# Altium PCB armBoardProto.PcbDoc
Units mil, origin at the board's own origin, x right, y up, seen from the top; angles counter-clockwise.
Board outline 1491.6 x 3133.88 mil, 2 copper layers (Top Layer, Bottom Layer); 31 components, 35 nets, 141 pads, 51 vias.
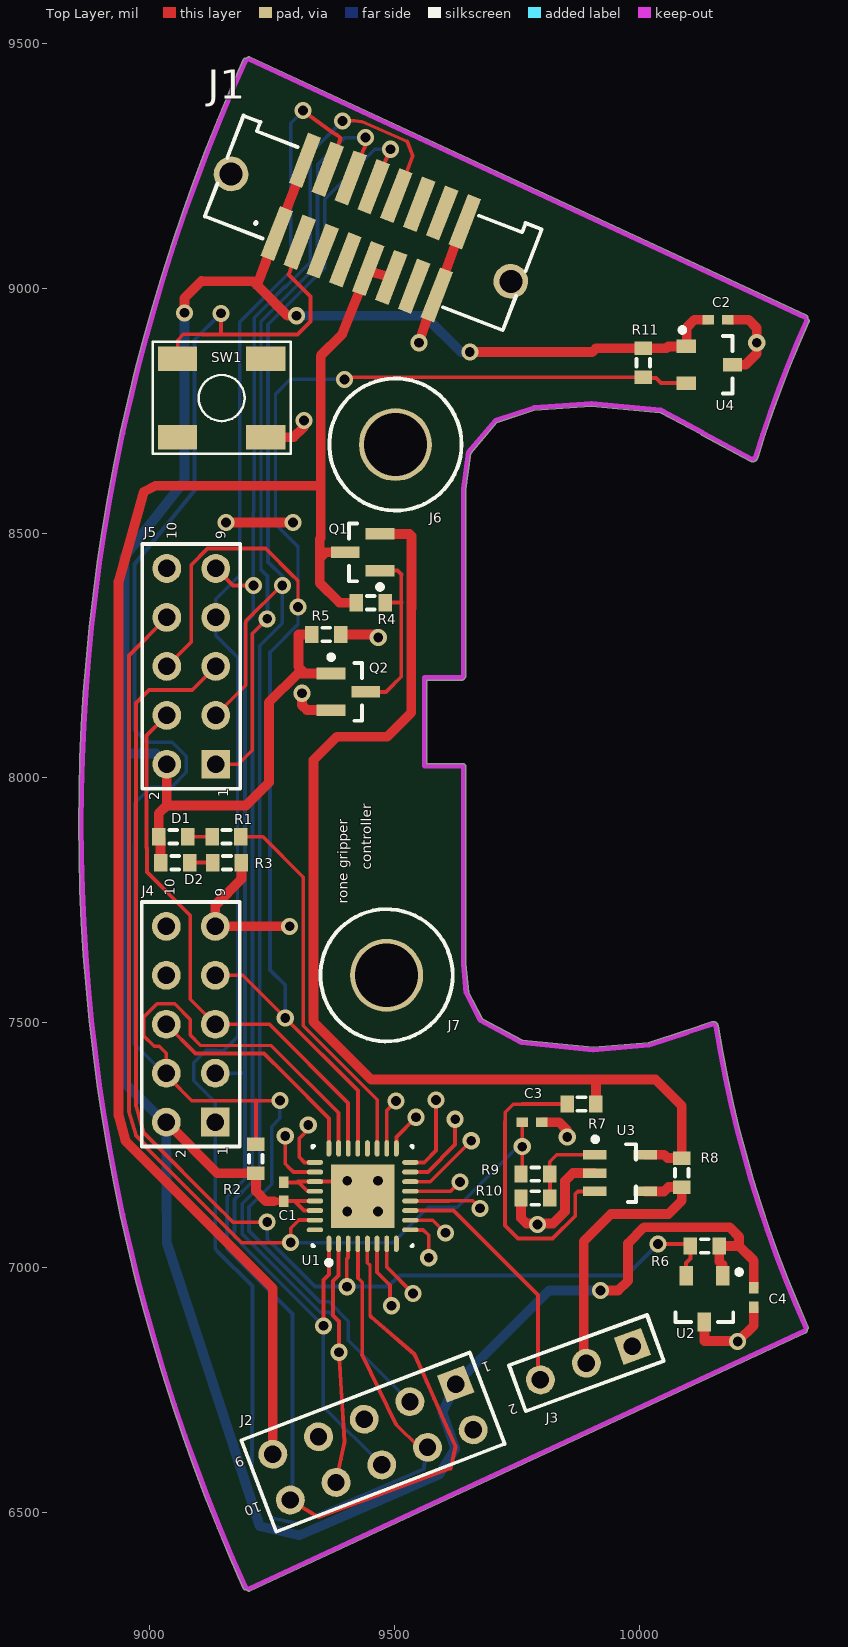
[diagram p0: Top Layer view]
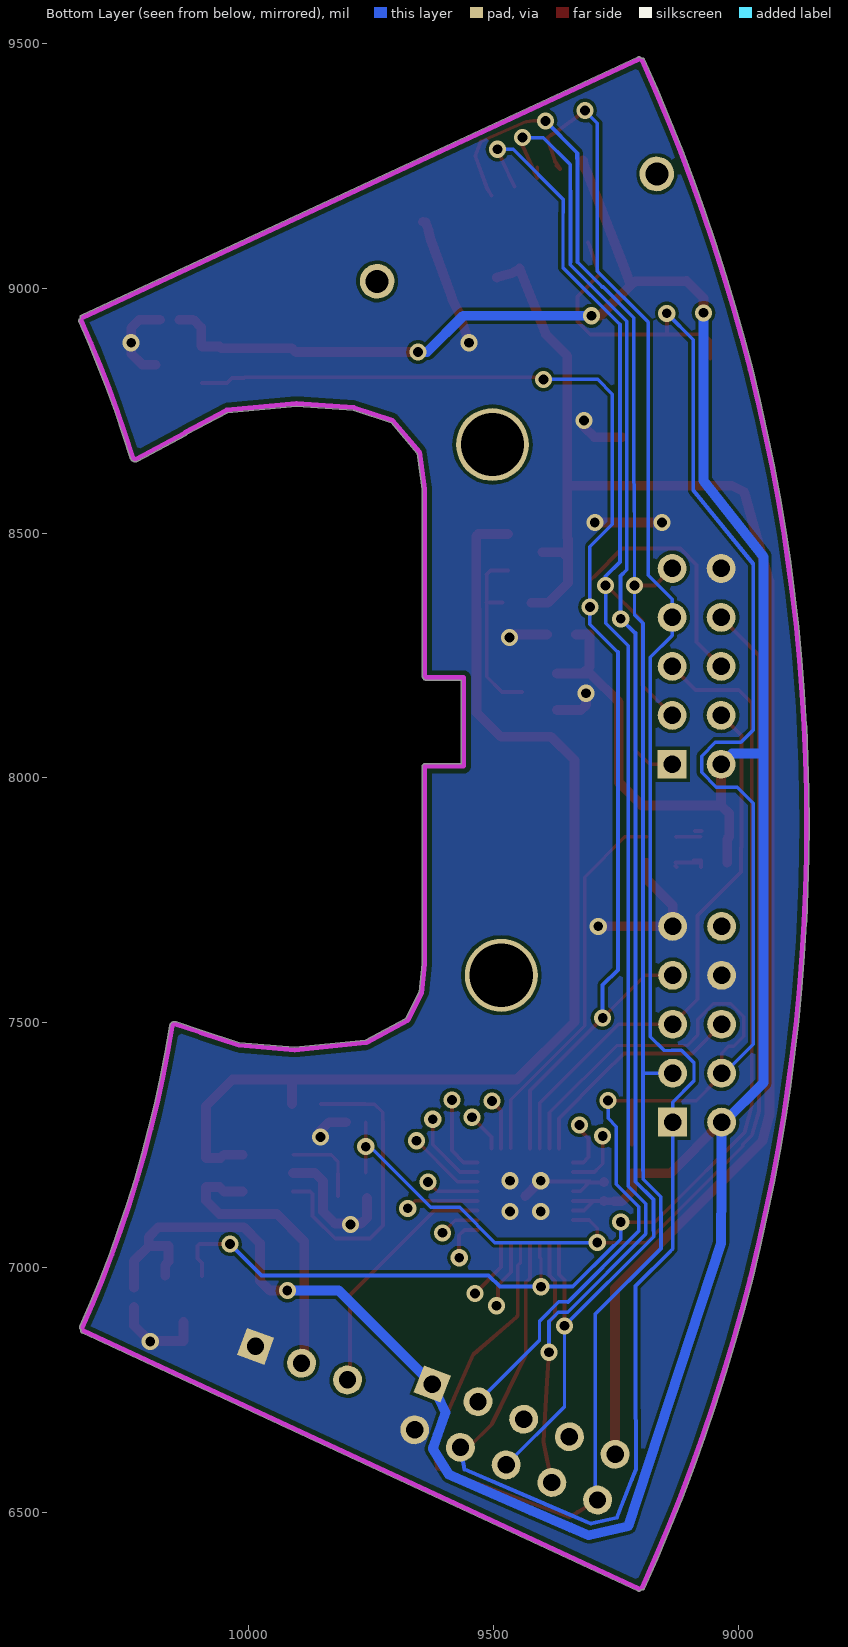
[diagram p1: Bottom Layer view, seen from below]

## Layer stack, top to bottom
Top Layer: signal copper 1.4
Dielectric: dielectric 12.6, FR-4, Dk 4.8
Bottom Layer: signal copper 1.4

## Board outline
9191.6,6344.49 ccw(c9196.17,6346.55) 9198.28,6342 ccw(c9202.85,6344.07) 9204.97,6339.52 10339.81,6866.36 ccw(c10337.7,6870.91) 10342.71,6870.91 ccw(c10337.7,6870.91) 10342.23,6873.06 ccw(c10340.12,6877.61) 10345.14,6877.61 ccw(c10340.12,6877.61) 10344.7,6879.65 cw(c12610.49,7891.01) 10161.31,7493.32 ccw(c10156.36,7492.51) 10160.87,7494.7 ccw(c10155.89,7494.15) 10160.64,7495.75 ccw(c10151.15,7492.56) 10147.98,7502.06 10147.96,7502.05 cw(c10149.56,7497.3) 10147.98,7502.06 10147.96,7502.05 10097.3,7485.14 ccw(c10098.88,7480.39) 10097.28,7485.14 ccw(c10098.31,7480.23) 10096.72,7484.99 10019.15,7459.09 9906,7449.69 9761.43,7464.25 9679.2,7508.47 9651.31,7562.7 9645.59,7620.44 9645.59,8023.43 ccw(c9640.57,8023.43) 9643.82,8027.25 ccw(c9640,8024) 9640,8029.01 9566.01,8029.01 9566.01,8199.99 9638.5,8199.99 ccw(c9638.5,8205) 9643.4,8203.93 ccw(c9640.57,8208.07) 9645.59,8208.07 9645.59,8589.89 9656.01,8663.06 9708.73,8725.75 9785.67,8751.43 9902.32,8759.59 10043.48,8746.28 10126.64,8701.57 ccw(c10129.01,8705.98) 10126.66,8701.56 ccw(c10130.65,8704.58) 10128.28,8700.17 10227.13,8647.01 ccw(c10229.53,8651.41) 10227.15,8647 cw(c10231.9,8655.82) 10227.14,8647.01 cw(c10231.9,8655.82) 10227.11,8647.02 10227.15,8647 ccw(c10231.9,8655.82) 10240.68,8651.01 ccw(c10236.28,8653.42) 10241.11,8652.04 ccw(c10236.91,8654.79) 10241.7,8653.3 cw(c12649,7906) 10346.49,8931.67 ccw(c10341.91,8933.71) 10346.92,8933.71 ccw(c10341.91,8933.71) 10344.03,8938.26 ccw(c10339.45,8940.28) 10344.46,8940.28 ccw(c10339.45,8940.28) 10341.56,8944.83 9204.94,9472.47 ccw(c9202.83,9467.93) 9198.27,9470 ccw(c9196.17,9465.45) 9191.6,9467.51 ccw(c12649,7906)

## Design rules (kind name [scope] priority, off if disabled: settings)
Clearance Clearance_1 [All vs OnLayer('Keep-Out Layer')] p1: gap=10
Clearance "Via to Pad Clearance" [(InPadClass('All Pads')) vs IsVia] p2: gap=20
Clearance [All] p3: gap=7
ComponentClearance [All] p1: gap=10 collisioncheckmode=3 verticalgap=10 showdistances=TRUE
HoleSize [All] p1: absolutevalues=TRUE maxlimit=250 minlimit=20 maxpercent=80.000 minpercent=20.000
MinimumAnnularRing [All] p1: minimumring=7
MinimumSolderMaskSliver [All] p1: minsoldermaskwidth=0
PolygonConnect PolygonConnect_2 [All] p1: connectstyle=Direct reliefconductorwidth=10 reliefentries=4 polygonreliefangle="90 Angle"
PolygonConnect PolygonConnect_1 [InNet('5V')] p2 off: connectstyle=Direct reliefconductorwidth=10 reliefentries=4 polygonreliefangle="90 Angle"
PolygonConnect [All] p3 off: connectstyle=Relief reliefconductorwidth=10 reliefentries=4 polygonreliefangle="90 Angle"
RoutingVias [All] p1: holewidth=20 width=35 viastyle="Through Hole" minholewidth=20 minwidth=35 maxholewidth=20 maxwidth=35
SMDNeckDown [All] p1: percent=120.000
ShortCircuit [All] p1: allowed=TRUE
SilkToSilkClearance [All] p1: silktosilkclearance=0.5
SilkscreenOverComponentPads [All] p1: minsilkscreentomaskgap=1
SolderMaskExpansion [All] p1: expansion=4
Width "Schematic Width Constraint_7" [InNet('GND')] p1: maxlimit=185 minlimit=8 preferedwidth=20 minimp=50.000000 maximp=50.000000 favimp=50.000000
Width "Schematic Width Constraint_6" [InNet('3.3V') or InNet('VBAT') or InNet('VBAT_SWITCHED')] p2: maxlimit=50 minlimit=8 preferedwidth=20 minimp=50.000000 maximp=50.000000 favimp=50.000000
Width [All] p3: maxlimit=30 minlimit=7 preferedwidth=7 minimp=50.000000 maximp=50.000000 favimp=50.000000
22 further rules are at their usual default settings.

## Components (designator, comment, footprint, x,y, rotation, side; value= is the part's Value field where it differs from the comment)
C1 "Cap Semi" CAPC1005L 9274,7155 r270 top
C2 "Cap Semi" CAPC1005L 10161,8936 r180 top
C3 "Cap Semi" CAPC1005L 9781,7297 r180 top
C4 "Cap Semi" CAPC1005L 10234,6939 r90 top
D1 "Heartbeat (White)" SurfaceMount(603) 9048,7880 r0 top
D2 "Power LED (RED)" SurfaceMount(603) 9052,7827 r0 top
J1 "header" "HEADERSM 8X2" 9452,9124 r69 top
J2 "Header 5X2" HDR2X5 9625,6762 r201 top
J3 "Header 3" HDR1X3 9986,6839 r200 top
J4 "JTAG" HDR2X5 9134,7297 r90 top
J5 "Header 5X2" HDR2X5 9135,8028 r90 top
J6 "Mechanical_Hole" #4_Screw_Hole 9502,8681 r0 top
J7 "Mechanical_Hole" #4_Screw_Hole 9484,7597 r0 top
Q1 "DMG2301U-7" SOT-23 9435,8461 r180 top
Q2 "IRF540PBF" SOT-23 9406,8176 r0 top
R1 "DiodeRes" J1-0603 9157,7880 r0 top
R2 "ResetRes" J1-0603 9217,7222 r90 top
R3 "DiodeRes" J1-0603 9158,7827 r0 top
R4 "" J1-0603 9452,8358 r0 top
R5 "" J1-0603 9361,8293 r0 top
R6 "" J1-0603 10134,7044 r180 top
R7 "R_IN" J1-0603 9882,7334 r180 top
R8 "RLOAD" J1-0603 10087,7194 r270 top
R9 "LPF" J1-0603 9788,7191 r180 top
R10 "R_OUT" J1-0603 9788,7142 r0 top
R11 "" J1-0603 10008,8848 r270 top
SW1 "Switch-TL330" SwitchTall-TL330 9147,8776 r0 top
U1 "MSP430G2553" QFN-32 9435,7146 r90 top
U2 "A3211-12" "SOT-23 W" 10133,6936 r270 top
U3 "LT6106" TSOT-23-5_LT6106 9961,7193 r0 top
U4 "A3211-12" "SOT-23 W" 10143,8844 r0 top

## Footprints (in the part's own frame and the unit in brackets; to place one, negate y for a bottom-side part, rotate by r counter-clockwise, add the part's x,y. Pads: shape width x height; smd on the part's side, far side on the other; paste and mask are expansions set on the pad)
#4_Screw_Hole [mil] "#4 Screw Hole, 3.2766mm Hole Dia., Plated"
  round 149 hole 129: 1(0,0)
  silkscreen extent -135,-135 135,135
CAPC1005L [mm] "Chip Capacitor, Body 1.0x0.5mm, IPC High Density"
  rect 0.6x0.5 smd: 1(-0.5,0) 2(0.5,0)
  body extent -0.55,-0.3 0.55,0.3, height 1.3
HDR1X3 [mm] "Connector; Header; 3 Position"
  rect 1.5x1.5 hole 0.9: 1(0,0)
  round 1.5 hole 0.9: 2(2.54,0) 3(5.08,0)
  silkscreen extent -1.27,-1.27 6.35,1.27
HDR2X5 [mm] "Connector; Header; 5x2 Position"
  rect 1.5x1.5 hole 0.9: 1(0,0)
  round 1.5 hole 0.9: 2(0,2.54) 3(2.54,0) 4(2.54,2.54) 5(5.08,0) 6(5.08,2.54) 7(7.62,0) 8(7.62,2.54) 9(10.16,0) 10(10.16,2.54)
  silkscreen extent -1.27,-1.27 11.43,3.81
"HEADERSM 8X2" [mm]
  rect 2.795x0.74 smd: 1(-2.032,4.445) 2(2.033,4.445) 3(-2.032,3.175) 4(2.033,3.175) 5(-2.032,1.905) 6(2.033,1.905) 7(-2.032,0.635) 8(2.033,0.635) 9(-2.032,-0.635) 10(2.033,-0.635) 11(-2.032,-1.905) 12(2.033,-1.905) 13(-2.032,-3.175) 14(2.033,-3.175) 15(-2.032,-4.445) 16(2.033,-4.445)
  round 1.8 hole 1.19: c1(0,7.773) c2(0,-7.773)
  silkscreen extent -2.54,-8.29 3.1,8.26
J1-0603 [mm] "Chip Resistor, Body 1.6x0.8mm, IPC High Density"
  rect 0.7x0.9 smd: 1(-0.75,0) 2(0.75,0)
  silkscreen extent -0.2,-0.35 0.2,0.35, body extent -0.85,-0.48 0.85,0.48, height 0.9
QFN-32 [mm] "QFN, 32-Leads, Body 5.2x5.2mm (max), Pitch 0.50mm, IPC Medium Density"
  oval 0.85x0.25 smd: 1(-2.475,1.75) 2(-2.475,1.25) 3(-2.475,0.75) 4(-2.475,0.25) 5(-2.475,-0.25) 6(-2.475,-0.75) 7(-2.475,-1.25) 8(-2.475,-1.75) 17(2.475,-1.75) 18(2.475,-1.25) 19(2.475,-0.75) 20(2.475,-0.25) 21(2.475,0.25) 22(2.475,0.75) 23(2.475,1.25) 24(2.475,1.75)
  oval 0.25x0.85 smd: 9(-1.75,-2.475) 10(-1.25,-2.475) 11(-0.75,-2.475) 12(-0.25,-2.475) 13(0.25,-2.475) 14(0.75,-2.475) 15(1.25,-2.475) 16(1.75,-2.475) 25(1.75,2.475) 26(1.25,2.475) 27(0.75,2.475) 28(0.25,2.475) 29(-0.25,2.475) 30(-0.75,2.475) 31(-1.25,2.475) 32(-1.75,2.475)
  rect 3.3x3.3 smd: 33(0,0)
  silkscreen extent -3.57,-2.6 2.6,2.6, body extent -2.57,-2.58 2.58,2.57, height 1
SOT-23 [mm] "SOT23, 3-Leads, Body 3.0x2.5mm (max), Pitch 0.95mm, IPC Medium Density"
  rect 1.5x0.6 smd: 1(-0.9,0.95) 2(-0.9,-0.95) 3(0.9,0)
  silkscreen extent -1.03,-1.5 0.7,1.92, body extent -0.7,-1.5 0.7,1.5, height 1.2
"SOT-23 W" [mm] "SOT23, 3-Leads, Body 3.0x2.5mm (max), Pitch 0.95mm, IPC Medium Density"
  rect 1x0.7 smd: 1(-1.2,0.95) 2(-1.2,-0.95) 3(1.2,0)
  silkscreen extent -1.52,-1.5 1.2,1.93, body extent -1.19,-1.5 1.22,1.5, height 1.2
SurfaceMount(603) [mm]
  rect 0.7x0.9 smd: 1(-0.75,0) 2(0.75,0)
  silkscreen extent -0.2,-0.35 0.2,0.35, body extent -0.85,-0.48 0.85,0.48, height 0.9
SwitchTall-TL330 [mil] "Small SMDTall Tact Switch E-Switch TL330"
  rect 80x50 smd: 1(-90,80) 2(90,80) 3(-90,-80) 4(90,-80)
  silkscreen extent -141,-114 141,115
TSOT-23-5_LT6106 [mm] "A SOT-23 package with 5 pins for LT6106"
  rect 1.22x0.5 smd: 1(-1.31,0.95) 2(-1.31,0) 3(-1.31,-0.95) 4(1.31,-0.95) 5(1.31,0.95)
  silkscreen extent -1.42,-1.5 0.81,1.88, body extent -0.81,-1.5 0.84,1.5, height 1.2

## Part data
C1 C2 C3 C4: "Capacitor (Semiconductor SIM Model)"
D1 D2: library part LED
J1: library part "HEADER 8X2"
J2 J5: "Header, 5-Pin, Dual row"
J3: "Header, 3-Pin"
J4: library part "Header 5X2", "Header, 5-Pin, Dual row"
J6 J7: "A mechanical hole for mounting the board"
Q1: library part P-Mosfet
Q2: library part N-Mosfet
R1 R2 R3 R4 R5 R6 R7 R8 R9 R10 R11: library part Res3, "Resistor"
U2 U4: library part A311-12, "Hall Effect Sensor"
U3: "Current Sense Amplifier"

## Via types
v1: diameter 35, hole 20, Top Layer to Bottom Layer, 51 vias

## Nets (pads, with @x,y where several pads share a name; then routed paths per layer and width w, separated by ;. In a path a pad name is that pad's centre, name@x,y a point inside that pad or via, vN(x,y) a via of type N, cw(c..) or ccw(c..) an arc to the next point about the centre after c; other vN are vias at no path point)
3.3V: C1.2 C2.2 C4.2 D1.1 D2.1 J1.1 J1.2 J2.1 J4.2 J5.2 Q2.1 R2.1 R5.1 R6.1 R11.1 U1.29 U1.30 U2.1 U4.1 | length 7067.7
  Top Layer w8: C1.2@9274.84,7136.16 9295.84,7136.16 ; U1.30 9315.53,7116.47 9295.84,7136.16 ; U1.29 9295.84,7136.16
  Top Layer w15: 9254,7135.31 C1.2
  Top Layer w20: D2.1 9022.47,7876 D1.1 9018.47,7927.47 9035,7944 ; J4.2 9138.53,7192.47 R2.1 9217,7156 9237.69,7135.31 9254,7135.31 ; J5.2 9035,7944 ; v1(9071,8950) 9071,8980 9106,9015 9106.5,9014.5 9211.5,9014.5 9219.5,9006.5 ; C1.2 C1.2@9274.84,7136.16 ; v1(9300,8944) 9282,8944 9219.5,9006.5 ; J1.2 9313,9245 9312,9243 9310,9240 J1.1 9238,9056 9219.5,9006.5 ; R5.1 9304,8293 9304,8227 9317.6,8213.4 ; Q2.1 9317.6,8213.4 ; v1(9654,8870) 9904,8870 9911.53,8877.53 R11.1 10055.53,8877.53 10059.4,8881.4 U4.1 10097,8882.65 10097,8920 10113,8936 C2.2 ; v1(9921,6953) 9957,6953 9977,6973 9977,7049.5 10010,7082.5 10184.5,7082.5 10204,7063 10204,7044 ; U2.1 10170.4,7005.6 10163.53,7012.47 R6.1 10204,7044 ; C4.2 10234,7014 10204,7044 ; 9035,7944 9197,7944 9244,7991 9244,8154.79 9302.61,8213.4 9317.6,8213.4
  Bottom Layer w20: J4.2@9028,7298 8948.5,7377.5 8948.5,8050 ; J4.2 9034.5,7173.5 9035,7051 9224.7,6472 9305.18,6453.12 9342.68,6469 9423.15,6504.15 9591.41,6577.65 9624.21,6629.72 9614.31,6657.78 9598,6704 J2.1 9816,6953 v1(9921,6953) ; J5.2 9013,8050 8948.5,8050 ; v1(9071,8950) 9071,8607 8948.5,8452 8948.5,8050 ; v1(9300,8944) 9561.67,8944 9635.67,8870 v1(9654,8870)
GND: C1.1 C2.1 C3.1 C4.1 J1.15 J1.16 J2.2 J3.1 J4.8 J4.9 J5.10 Q2.2 R3.2 R5.2 R10.1 SW1.4 U1.27 U1.28 U1.33 U2.3 U3.2 U4.3 | length 1912.9
  Top Layer w8: C1.1@9274.47,7174.21 9302.53,7174.21 ; U1.28 9322.21,7155.84 9302.53,7175.53 U1.27 U1.33@9405.47,7175.53
  Top Layer w20: v1(9156,8522) v1(9293,8522) ; R3.2 9187.53,7793.53 9134,7740 J4.9 v1(9286,7697) ; SW1.4 9294,8696 9314,8716 9314,8730 v1(9315,8730) ; C1.1 C1.1@9274.47,7174.21 ; v1(9311,8173) 9311,8148.6 9321,8138.6 Q2.2 ; R5.2 9467,8293 v1(9467,8287) ; U1.33@9405.47,7175.53 U1.33 ; v1(9550,8889) 9571,8952 9583,8975 J1.15 9628,9099 9633,9119 9639,9135 J1.16 ; R10.1 9758.47,7101.53 9770,7090 9824,7090 9848.31,7114.31 9848.31,7176.61 9864.7,7193 U3.2 ; C3.1 9836,7297 9853,7280 v1(9853,7267) ; U2.3 10133,6850 v1@10202,6850 ; C2.1 10223,8936 10240,8919 v1(10240,8889) 10240,8867 10217,8844 U4.3 ; v1(10201,6849) v1@10202,6850 ; C4.1 10234,6882 v1@10202,6850
  other v1: 9792,7088 9403.5,7114.5 9466.5,7114.5 9403.5,7177.5 9466.5,7177.5
GPIO_2.0: U1.9 | length 88.2
  Top Layer w8: U1.9 9558.9,7077.1 9570,7066 v1(9570,7020)
GPIO_2.1: U1.10 | length 82.2
  Top Layer w7: U1.10 9578.21,7096.79 v1(9604,7071)
GPIO_2.3: U1.15 | length 166.7
  Top Layer w8: U1.15 9568.21,7195.21 9624,7251 v1(9624,7303)
GPIO_2.4: U1.16 | length 165.5
  Top Layer w8: U1.16 9560.9,7214.9 9585,7239 v1(9585,7342)
GPIO_2.5: U1.17 | length 80.1
  Top Layer w8: U1.17 9503.9,7267 v1@9543.9,7307
  other v1: 9544,7307
GPIO_2.6: U1.26 | length 124.5
  Top Layer w7: v1(9277,7269) 9277,7212 9284,7205
  Top Layer w8: 9284,7205 9293.79,7195.21 U1.26
GPIO_2.7: U1.25 | length 109.6
  Top Layer w8: v1(9324,7291) 9324,7282 9305.5,7263.5 9305.5,7225.5 9316.1,7214.9 U1.25
GPIO_3.0: U1.7 | length 123.8
  Top Layer w8: U1.7 9484.21,7000.79 v1(9538,6947)
GPIO_3.1: U1.6 | length 138.8
  Top Layer w8: U1.6 9464.53,6990.47 9491,6964 9491,6925 v1(9494,6922)
GPIO_3.2: U1.12 | length 148.8
  Top Layer w7: 9612,7136.16 9659.84,7136.16 v1(9675,7121)
  Top Layer w8: U1.12 9612,7136.16
GPIO_3.3: U1.13 | length 109.5
  Top Layer w8: U1.13 9614.84,7155.84 v1(9634,7175)
GPIO_3.4: U1.14 | length 159.1
  Top Layer w7: U1.14 9573.53,7175.53 v1(9657,7259)
GPIO_3.5: U1.18 | length 104.3
  Top Layer w8: U1.18 9484.21,7321.21 v1(9503,7340)
HALL_SENSE0_ADC3: J5.5 R6.2 U1.3 U2.2 | length 2551.1
  Top Layer w7: 9147.15,7116.15 9170.3,7093 v1(9240,7093) ; v1(9403,6961) 9403,7018.53 9405.47,7021
  Top Layer w8: J5.5 9087,8180 8999,8180 8972.47,8153.47 8972.47,7329.79 8987.47,7275.83 9147.15,7116.15 ; 9405.47,7021 U1.3 ; v1(10038,7048) 10100.47,7048 R6.2 10104.47,7018.47 10095.6,7009.6 U2.2
  Bottom Layer w7: v1(9240,7093) 9240,7058.29 9268.65,7029.65
  Bottom Layer w8: 9255,7044 9338,6961 v1(9403,6961) 9487,6961 9510,6984 9974,6984 v1(10038,7048)
JTAG_BOTTOM_TCK_SPI_CLK_ADC4: J1.4 J2.4 J4.1 J5.7 U1.4 | length 4108.6
  Top Layer w7: 9425.16,6979.15 9434,6970.31 9434,6821.16 ; 9503,6680.19 9550.39,6632.81 J2.4
  Top Layer w8: v1(9313,9363) 9373,9319 9383,9313 9390,9307 9374,9259 J1.4 J1.4@9371,9250.52 ; 9425.16,6979.15 U1.4 ; 9434,6821.16 9503,6680.19
  Bottom Layer w7: 9139,7033 9134,7038 J4.1 9134,7338 9090.5,7381.5 9090.5,7418.5 9116,7444 9136,7444 9136.6,7443.4 9151,7443.4 9179.5,7471.9 9179.5,8246.5 9135,8291 J5.7 9135,8365 9184,8414 9184,8931.24 9288,9035.24 9288,9337 9313,9362 v1(9313,9363)
  Bottom Layer w8: 9139,7033 9210,6962 9210,6791 9209,6588 9217.29,6566.94 9248,6489 9300.86,6477 9344.47,6495.73 9446.54,6539.57 9559,6587.88 J2.4
JTAG_BOTTOM_TDI_HALL_SENSE1_I2C_CLK: J4.7 J5.6 R11.2 U1.21 U4.2 | length 3235.2
  Top Layer w7: J4.7 9190,7597 v1(9277,7510) ; 9294,8411.72 9303,8402.72 v1(9303,8349) ; v1(9398,8814) 9402.47,8818.47 R11.2 R11.2@10009.47,8817
  Top Layer w8: J5.6 9085,8278 9085,8435.31 9118.21,8468.53 9237.19,8468.53 9294,8411.72 ; v1(9277,7510) 9425.16,7361.84 U1.21 ; R11.2@10009.47,8817 10034,8817 10044.4,8806.6 U4.2
  Bottom Layer w7: 9246,8257 9303,8314 v1(9303,8349) 9303,8472.4 9257,8518.4 9257,8784 9287,8814 v1(9398,8814)
  Bottom Layer w8: 9246,8257 9246,7608 9277,7577 v1(9277,7510)
JTAG_BOTTOM_TDO_I2C_DATA: J4.5 J5.4 U1.22 | length 1137
  Top Layer w8: J5.4 8993.69,8086.69 8993.69,7857.73 8994.47,7856.95 8994.47,7807.95 9083,7719.42 9083,7548 J4.5 9244.52,7497 9405.47,7336.05 U1.22
JTAG_BOTTOM_TEST: J4.6 U1.24 | length 473.1
  Top Layer w8: J4.6 9093.47,7437.53 9233.47,7437.53 9277,7394 9366.1,7304.9 U1.24
JTAG_BOTTOM_TMS_SPI_SEL_EXPAND0_ADC5: J1.10 J2.10 J4.3 J5.9 U1.5 | length 4272.4
  Top Layer w7: v1(9394,9342) 9418.55,9342 cw(c9418.55,9263.59) 9433.08,9340.64 9525.88,9300 ; U1.5 9444.84,7010 9450.03,7004.81 9450.03,6901.86 9452.13,6899.76
  Top Layer w8: J5.9 9170,8393 v1(9212,8393) ; J2.10 9328.04,6500.39 9345,6490 9615,6590 9625,6634 9611,6665.5 9605,6679 9581,6733 9565.8,6767.2 9541,6823 9452.48,6899.4 9452.13,6899.76 ; J1.10 9512,9202 9537.09,9271 9525.88,9300
  Bottom Layer w7: J4.3 9194.5,7397 ; 9158,7113 9158.5,7113.5 9158.5,7144.79 9194.5,7180.79 9194.5,7198 ; 9211.5,8332.5 9212,8333 v1(9212,8393) 9212,8514 9212.71,8570.27 9213.5,8633 9213.5,8940.23 9246.13,8972.87 ; 9281.98,9007.4 9328,9053.42
  Bottom Layer w8: 9158,7113 9158,7039 9292.09,6904.91 9292.09,6529.99 J2.10 ; 9194.5,7198 9194.5,7397 9194.5,7451.79 9195,7452.29 9195,8316 9211.5,8332.5 ; 9246.13,8972.87 9275.77,9002.5 9277.08,9002.5 9281.98,9007.4 ; 9328,9053.42 9328,9276 9329,9277 ; 9329,9265 9329,9277 ; v1(9394,9342) 9329,9277
LED_HEARTBEAT: R1.2 U1.19 | length 778.1
  Top Layer w7: R1.2 9231.5,7880 9314,7797.5 9314,7493.51 9464.53,7342.98 U1.19
NetD1_2: D1.2 R1.1 | length 64.2
  Top Layer w8: D1.2@9074.53,7892 D1.2@9088,7892 ; D1.2 9125.47,7880 9126.47,7879 R1.1
NetD2_2: D2.2 R3.1 | length 78.8
  Top Layer w8: D2.2@9076.53,7818.5 9076.53,7832 D2.2@9092,7832 ; D2.2 R3.1 ; R3.1@9126.47,7818 R3.1@9128.47,7820
NetQ1_1: Q1.1 Q2.3 R4.2 | length 373.6
  Top Layer w7: 9498,8191 9514,8207 9514,8358 9514,8416
  Top Layer w8: Q2.3 9483,8176 9498,8191 ; Q1.1 9506.4,8423.6 9514,8416 ; R4.2 9514,8358
NetR7_2: R7.2 U3.3 | length 624.7
  Top Layer w7: 9726,7298.89 9726,7317 9743,7334 9761.11,7334
  Top Layer w8: 9726,7298.89 9726,7086 9752.5,7059.5 9823.2,7059.5 9869.31,7105.61 9869.31,7150 9874.91,7155.6 U3.3 ; 9761.11,7334 R7.2
NetR9_1: R9.1 R10.2 U3.1 | length 168.2
  Top Layer w7: R9.1 9817.53,7216.53 9831.4,7230.4 U3.1
  Top Layer w8: R10.2@9817.53,7146 R9.1
RESET_430: J1.3 J2.3 J4.4 R2.2 SW1.1 U1.23 | length 4212.9
  Top Layer w7: J4.4 9034,7438 9020,7452 9009,7452 8988.47,7472.53 8988.47,7512 9015,7538.53 9051.2,7538.53 9083,7506.73 9083,7475 9104.47,7453.53 9248.26,7453.53 9385.79,7316 ; SW1.1 9057,8894 9069,8906 9107,8906 ; 9062.5,7364.5 9086,7341 9217,7341 v1(9266,7341)
  Top Layer w8: J4.4@9029,7398 9062.5,7364.5 ; 9107,8906 9146,8906 ; v1(9146,8949) 9146,8906 ; R2.2 9217,7341 ; J1.3 9303.14,9085.54 9284,9028 9328.5,8983.5 9328.5,8932.19 9302.31,8906 9146,8906 ; U1.23 9385.79,7316
  Bottom Layer w7: 8969.5,7456.5 9029,7397 J4.4 ; 8969.5,7865 8969.5,7948.5 9002,7981 9044.61,7981 9075.03,8011.42 9075.03,8044.58 9046.61,8073 8994.5,8073 8969.5,8098 ; 9203.21,7124 9249,7169.79 9249,7288 9266,7305 v1(9266,7341) ; 9347.79,6930 9366.81,6930 9406,6890.81 9406,6851.81 J2.3
  Bottom Layer w8: 8969.5,7456.5 8969.5,7865 ; 8969.5,8098 8969.5,8437 9092,8587.5 9092,8895 v1(9146,8949) ; 9203.21,7124 9203.21,7074.57 9347.79,6930
SERVO0: J3.3 U1.11 | length 507.5
  Top Layer w8: U1.11 9620.53,7116.47 9793,6944 9793,6775.66 J3.3
SERVO0_POWER: J3.2 R8.2 U3.4 | length 594.4
  Top Layer w8: J3.2 J3.2@9894,6806.77
  Top Layer w20: J3.2 9886.5,6810.33 9886.5,7053.5 9942.5,7109.5 10059.5,7109.5 10087,7137 R8.2 10059.47,7164.47 10050.6,7155.6 U3.4
SERVO0_SENSE_ADC0: C3.2 J5.8 R9.2 U1.31 | length 2243.6
  Top Layer w7: 9177.79,7061 9187.79,7051 v1(9288,7051) 9288,7080 9304.79,7096.79 ; R9.2@9761,7193.53 v1(9761,7247) C3.2@9761,7296.68
  Top Layer w8: J5.8 8957.47,8250.47 8957.47,7319 8972.47,7269.62 8990.89,7251.19 8990.89,7247.89 9177.79,7061 ; 9304.79,7096.79 U1.31
  Bottom Layer w7: v1(9288,7051) 9497,7051 9569,7123 9628,7123 9752,7247 v1(9761,7247)
SPI_MISO_ADC1: J1.6 J2.6 J5.1 U1.1 | length 3632.8
  Top Layer w7: J5.1 9181,8028 9210,8057 9210,8295 v1(9240,8325) ; v1@9440.42,9290.9 9441,9291.48 v1(9441,9308)
  Top Layer w8: v1(9355,6881) 9355,6974.52 9366.1,6985.62 U1.1 ; J1.6@9410.66,9247 J1.6 9416,9237 v1@9440.42,9290.9
  Bottom Layer w7: 9173,7076 9173,7063 v1(9355,6881) 9355,6716.09 J2.6 ; 9240.5,8412.5 9227.5,8425.5 9227.5,8933.02 9228.11,8933.02 9343,9047.91 9343,9054 ; 9343,9199 9343,9253 9398,9308 v1(9441,9308)
  Bottom Layer w8: 9173,7076 9173,7138.79 9209.5,7175.29 9209.5,7237.23 9210,7237.73 9210,8296 ; 9211,8296 v1(9240,8325) 9240.5,8325.5 9240.5,8412.5 ; 9343,9054 9343,9199
SPI_MOSI_ADC2: J1.8 J2.8 J5.3 U1.2 | length 3688.5
  Top Layer w7: J5.3 9196,8189 9196,8320.6 9268.4,8393 v1(9271,8393)
  Top Layer w8: J2.8 9390.47,6608.47 9397.76,6644 9390.41,6766.59 v1(9386.79,6827) 9386.79,6889.52 9374.5,6901.81 9374.5,6972.81 9385.79,6984.09 U1.2 ; J1.8 9468,9230 v1(9492,9284)
  Bottom Layer w7: 9242,8926.31 9358,9042.31 9358,9154 9357.5,9154.5 9357.5,9182 9358,9182 9460,9284 v1(9492,9284) ; v1(9271,8393) 9271,8316.4 9225,8270.4 9225,7166.29 9188.71,7130.01 9188.71,7068.57 9348.28,6909 9367.31,6909 9386,6890.31 v1@9386,6827
  Bottom Layer w8: 9242,8926.31 9242,8441.09 9271,8412.09 v1(9271,8393) ; 9386,6890.31 9386.79,6889.52 v1(9386.79,6827)
VBAT: J1.9 J1.11 J2.9 Q1.3 R4.1 | length 3334.4
  Top Layer w20: J2.9 9251.57,6957.52 8951.47,7257.62 8936.47,7310.3 8936.47,8401.47 8987.84,8584.38 9012.21,8597 9348.5,8597 9349.5,8598 ; Q1.3 9359,8461 9347.5,8449.5 ; R4.1 9388,8358 9347.5,8398.5 9347.5,8449.5 ; J1.11 9462,9031 J1.9 9393,8906 9349.5,8862.5 9349.5,8598 ; 9347.5,8449.5 9347.5,8488 9349.5,8490 9349.5,8598
VBAT_SWITCHED: Q1.2 R7.1 R8.1 U3.5 | length 2258
  Top Layer w20: Q1.2 9531,8498.4 9535,8494.4 9535,8346 9534.5,8345.5 9534.5,8133.5 9485,8084 9382,8084 9334.5,8036.5 9334.5,7502 9452.5,7384 9910,7384 10033,7384 10087,7330 R8.1 10057.47,7223.53 10050.6,7230.4 U3.5 ; R7.1 9911.53,7382.47
pads on no net: J1.5 J1.7 J1.12 J1.13 J1.14 J1.c1 J1.c2 J2.5 J2.7 J4.10 J6.1 J7.1 SW1.2 SW1.3 U1.8 U1.20 U1.32

## Polygon pours and split planes (outlines as drawn)
no net on Mechanical 1 "GND" (none, shelved): 9191.6,6344.49 ccw(c9196.17,6346.55) 9198.28,6342 ccw(c9202.85,6344.07) 9204.97,6339.52 10339.81,6866.36 ccw(c10337.7,6870.91) 10342.71,6870.91 ccw(c10337.7,6870.91) 10342.23,6873.06 ccw(c10340.12,6877.61) 10345.14,6877.61 ccw(c10340.12,6877.61) 10344.7,6879.65 cw(c12610.49,7891.01) 10161.31,7493.32 ccw(c10156.36,7492.51) 10160.87,7494.7 ccw(c10155.89,7494.15) 10160.64,7495.75 ccw(c10151.15,7492.56) 10147.98,7502.06 10147.96,7502.05 cw(c10149.56,7497.3) 10147.98,7502.06 10147.96,7502.05 10097.3,7485.14 ccw(c10098.88,7480.39) 10097.28,7485.14 ccw(c10098.31,7480.23) 10096.72,7484.99 10019.15,7459.09 9906,7449.69 9761.43,7464.25 9679.2,7508.47 9651.31,7562.7 9645.59,7620.44 9645.59,8023.43 ccw(c9640.57,8023.43) 9643.82,8027.25 ccw(c9640,8024) 9640,8029.01 9566.01,8029.01 9566.01,8199.99 9638.5,8199.99 ccw(c9638.5,8205) 9643.4,8203.93 ccw(c9640.57,8208.07) 9645.59,8208.07 9645.59,8589.89 9656.01,8663.06 9708.73,8725.75 9785.67,8751.43 9902.32,8759.59 10043.48,8746.28 10126.64,8701.57 ccw(c10129.01,8705.98) 10126.66,8701.56 ccw(c10130.65,8704.58) 10128.28,8700.17 10227.13,8647.01 ccw(c10229.53,8651.41) 10227.15,8647 cw(c10231.9,8655.82) 10227.14,8647.01 cw(c10231.9,8655.82) 10227.11,8647.02 10227.15,8647 ccw(c10231.9,8655.82) 10240.68,8651.01 ccw(c10236.28,8653.42) 10241.11,8652.04 ccw(c10236.91,8654.79) 10241.7,8653.3 cw(c12649,7906) 10346.49,8931.67 ccw(c10341.91,8933.71) 10346.92,8933.71 ccw(c10341.91,8933.71) 10344.03,8938.26 ccw(c10339.45,8940.28) 10344.46,8940.28 ccw(c10339.45,8940.28) 10341.56,8944.83 9204.94,9472.47 ccw(c9202.83,9467.93) 9198.27,9470 ccw(c9196.17,9465.45) 9191.6,9467.51 ccw(c12649,7906)
GND on Bottom Layer "GND" (solid, remove dead copper, pour order 4): 9191.6,6344.49 ccw(c9196.17,6346.55) 9198.28,6342 ccw(c9202.85,6344.07) 9204.97,6339.52 10339.81,6866.36 ccw(c10337.7,6870.91) 10342.71,6870.91 ccw(c10337.7,6870.91) 10342.23,6873.06 ccw(c10340.12,6877.61) 10345.14,6877.61 ccw(c10340.12,6877.61) 10344.7,6879.65 cw(c12610.49,7891.01) 10161.31,7493.32 ccw(c10156.36,7492.51) 10160.87,7494.7 ccw(c10155.89,7494.15) 10160.64,7495.75 ccw(c10151.15,7492.56) 10147.98,7502.06 10147.96,7502.05 cw(c10149.56,7497.3) 10147.98,7502.06 10147.96,7502.05 10097.3,7485.14 ccw(c10098.88,7480.39) 10097.28,7485.14 ccw(c10098.31,7480.23) 10096.72,7484.99 10019.15,7459.09 9906,7449.69 9761.43,7464.25 9679.2,7508.47 9651.31,7562.7 9645.59,7620.44 9645.59,8023.43 ccw(c9640.57,8023.43) 9643.82,8027.25 ccw(c9640,8024) 9640,8029.01 9566.01,8029.01 9566.01,8199.99 9638.5,8199.99 ccw(c9638.5,8205) 9643.4,8203.93 ccw(c9640.57,8208.07) 9645.59,8208.07 9645.59,8589.89 9656.01,8663.06 9708.73,8725.75 9785.67,8751.43 9902.32,8759.59 10043.48,8746.28 10126.64,8701.57 ccw(c10129.01,8705.98) 10126.66,8701.56 ccw(c10130.65,8704.58) 10128.28,8700.17 10227.13,8647.01 ccw(c10229.53,8651.41) 10227.15,8647 cw(c10231.9,8655.82) 10227.14,8647.01 cw(c10231.9,8655.82) 10227.11,8647.02 10227.15,8647 ccw(c10231.9,8655.82) 10240.68,8651.01 ccw(c10236.28,8653.42) 10241.11,8652.04 ccw(c10236.91,8654.79) 10241.7,8653.3 cw(c12649,7906) 10346.49,8931.67 ccw(c10341.91,8933.71) 10346.92,8933.71 ccw(c10341.91,8933.71) 10344.03,8938.26 ccw(c10339.45,8940.28) 10344.46,8940.28 ccw(c10339.45,8940.28) 10341.56,8944.83 9204.94,9472.47 ccw(c9202.83,9467.93) 9198.27,9470 ccw(c9196.17,9465.45) 9191.6,9467.51 ccw(c12649,7906)

## Keep-outs
Keep-Out Layer:
  lines w10: 9196.17,6346.55 cw(c12649,7906) 9196.17,9465.45 ; 9202.85,6344.07 10337.7,6870.91 ; 9202.83,9467.93 10339.45,8940.28 ; 9561,8024 9561,8205 9638.5,8205 ; 9562,8024 9640,8024 ; 9640.57,8023.43 9640.57,7620.19 9646.41,7561.25 9675.45,7504.79 9759.93,7459.36 9905.96,7444.65 10020.16,7454.14 10098.31,7480.23 ; 9640.57,8208.07 9640.57,8590.25 9651.25,8665.19 9705.8,8730.06 9784.69,8756.39 9902.38,8764.63 10044.96,8751.18 10129.01,8705.98 ; 10098.88,7480.39 10149.56,7497.3 ; 10130.65,8704.58 10229.51,8651.43 ccw(c10231.9,8655.82) 10236.28,8653.42 cw(c10231.9,8655.82) 10229.53,8651.41 ; 10156.36,7492.51 ccw(c12610.49,7891.01) 10340.12,6877.61 ; 10236.91,8654.79 cw(c12649,7906) 10341.91,8933.71 ; 10149.56,7497.3 cw(c10151.15,7492.56) 10155.89,7494.15 ccw(c10151.15,7492.56) 10149.56,7497.3

## Silkscreen, mask and mechanical layers (free items; w line width, h text height)
Top Overlay:
  text "controller" at 9453,7813 h20 r90
  text "rone gripper" at 9405,7743 h20 r90
Top Solder:
  lines w10: 9207.07,6334.99 cw(c9202.85,6344.07) 9196.26,6336.54 cw(c9196.17,6346.55) 9187.04,6342.43 cw(c12649,7906) 9187.04,9469.57 cw(c9196.17,9465.45) 9196.24,9475.46 cw(c9202.83,9467.93) 9207.05,9477.01 10343.66,8949.37 cw(c10339.45,8940.28) 10349.46,8940.29 cw(c10341.91,8933.71) 10351.93,8933.71 cw(c10341.91,8933.71) 10351.06,8929.64 ; 9207.09,6334.99 10341.9,6861.81 ccw(c10337.7,6870.91) 10347.71,6870.91 ; 10095.12,7489.72 10018.13,7464.03 9906.05,7454.71 9762.92,7469.12 9682.94,7512.14 9656.19,7564.14 9650.59,7620.69 9650.59,8023.43 ccw(c9640.57,8023.43) 9647.36,8030.79 ccw(c9640,8024) 9640,8034.02 9571.02,8034.02 9571.02,8194.98 9638.5,8194.98 ccw(c9638.5,8205) 9647.7,8201.03 ccw(c9640.57,8208.07) 9650.59,8208.07 9650.59,8589.54 9660.76,8660.94 9711.65,8721.46 9786.65,8746.49 9902.26,8754.58 10042,8741.4 10123.5,8697.58 ccw(c10130.65,8704.58) 10125.91,8695.76 ; 10095.92,7489.95 10146.37,7506.79 ; 10125.93,8695.75 10224.74,8642.62 ; 10146.39,7506.8 cw(c10151.15,7492.56) 10165.38,7497.35 ; 10166.25,7494.09 ccw(c12610.49,7891.01) 10349.25,6881.72 cw(c10340.12,6877.61) 10350.14,6877.61 cw(c10340.12,6877.61) 10347.71,6871.08 ; 10224.78,8642.59 ccw(c10231.9,8655.82) 10245.07,8648.61 ; 10246.49,8651.85 cw(c12649,7906) 10351.05,8929.61

## Text inside footprints (layer, text, board x,y; h text height)
J2: Top Overlay "2" at 9747.03,6723.15 h20 r201; Top Overlay "1" at 9692.52,6809.34 h20 r201; Top Overlay "9" at 9188.39,6615.82 h20 r201; Top Overlay "10" at 9224.22,6522.46 h20 r201
J4: Top Overlay "10" at 9051,7759 h20 r90; Top Overlay "9" at 9154,7757 h20 r90; Top Overlay "1" at 9160,7228 h20 r90; Top Overlay "2" at 9074,7223 h20 r90
J5: Top Overlay "2" at 9020,7954 h20 r90; Top Overlay "1" at 9161,7961 h20 r90; Top Overlay "9" at 9155,8488 h20 r90; Top Overlay "10" at 9055,8488 h20 r90